# Altium PCB etb_drv.PcbDoc (part 1 of 2)
Units mil, origin at the board's own origin, x right, y up, seen from the top; angles counter-clockwise.
Board outline 2950 x 2250 mil, 2 copper layers (Top Layer, Bottom Layer), stack 44.882 mil thick; 125 components, 73 nets, 385 pads, 207 vias.
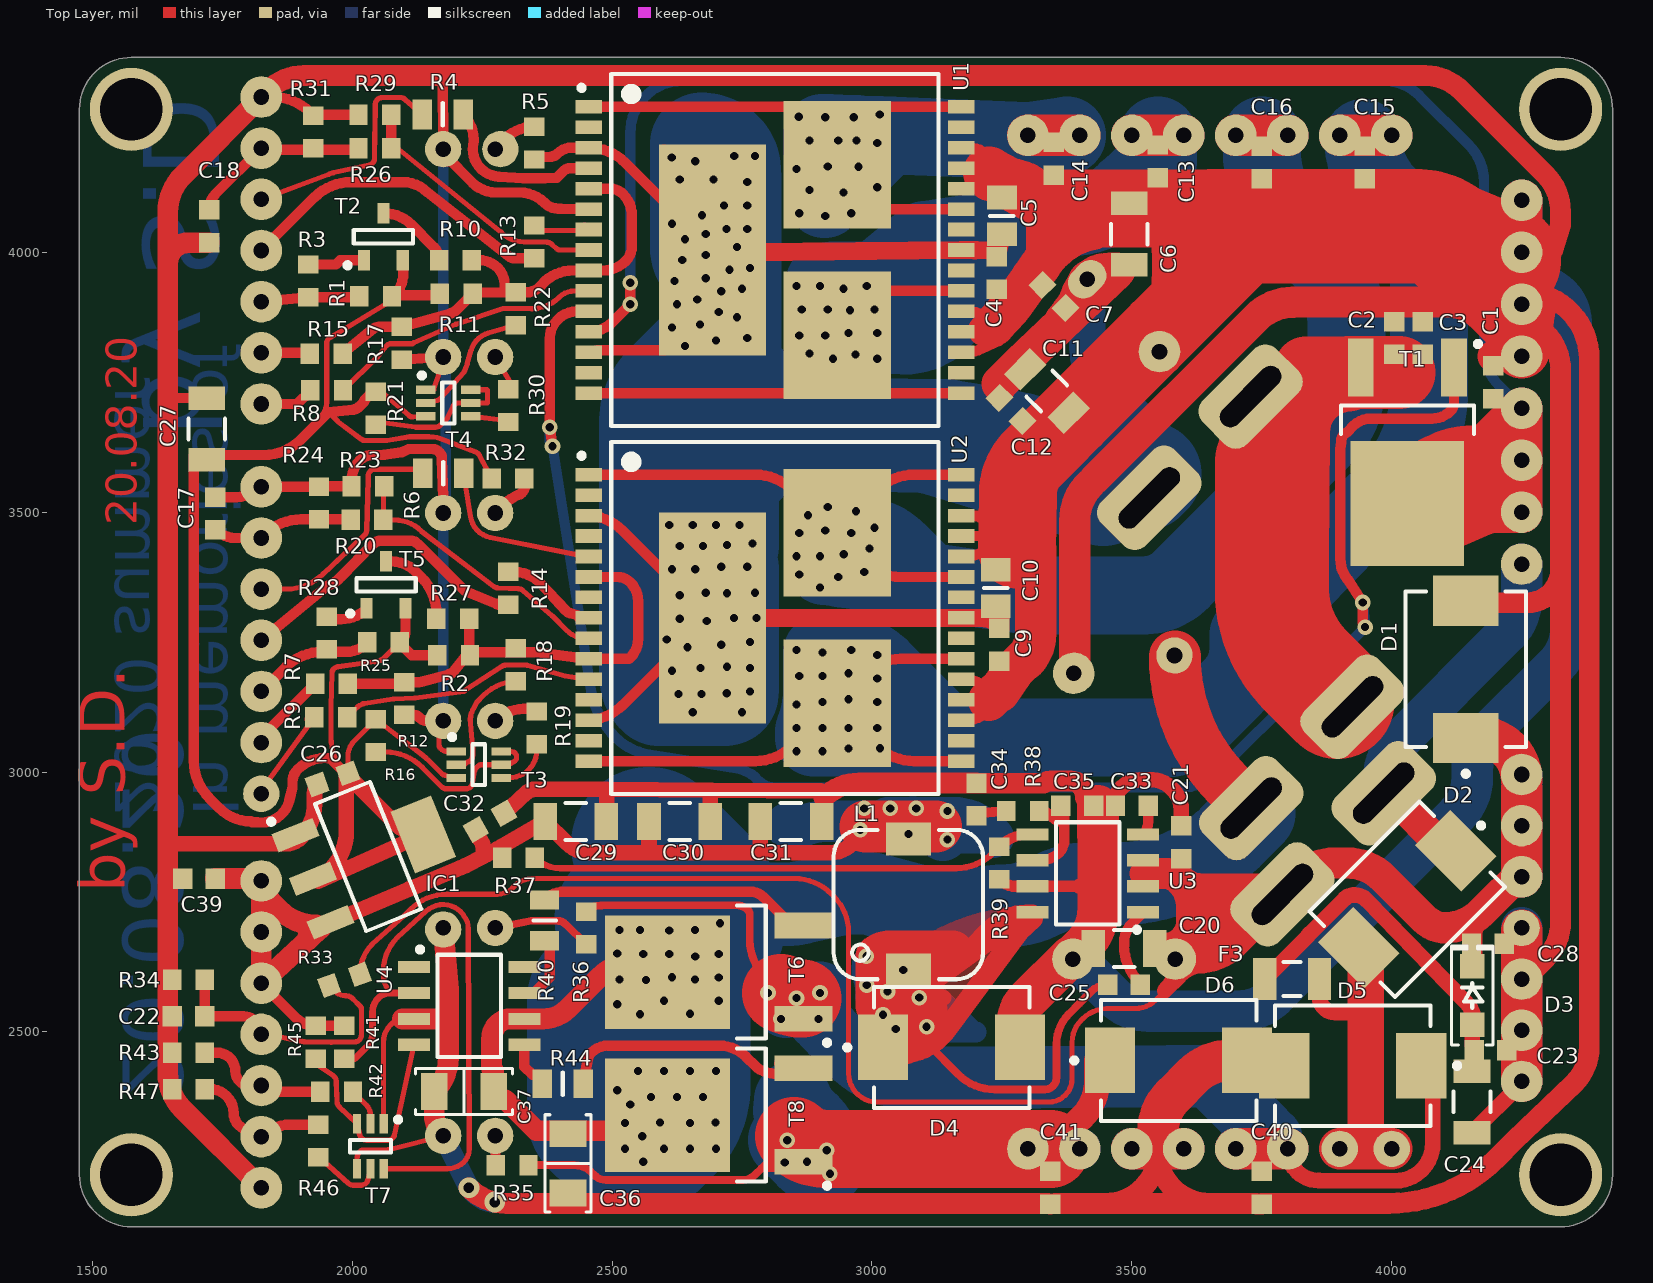
[diagram p0: Top Layer view]
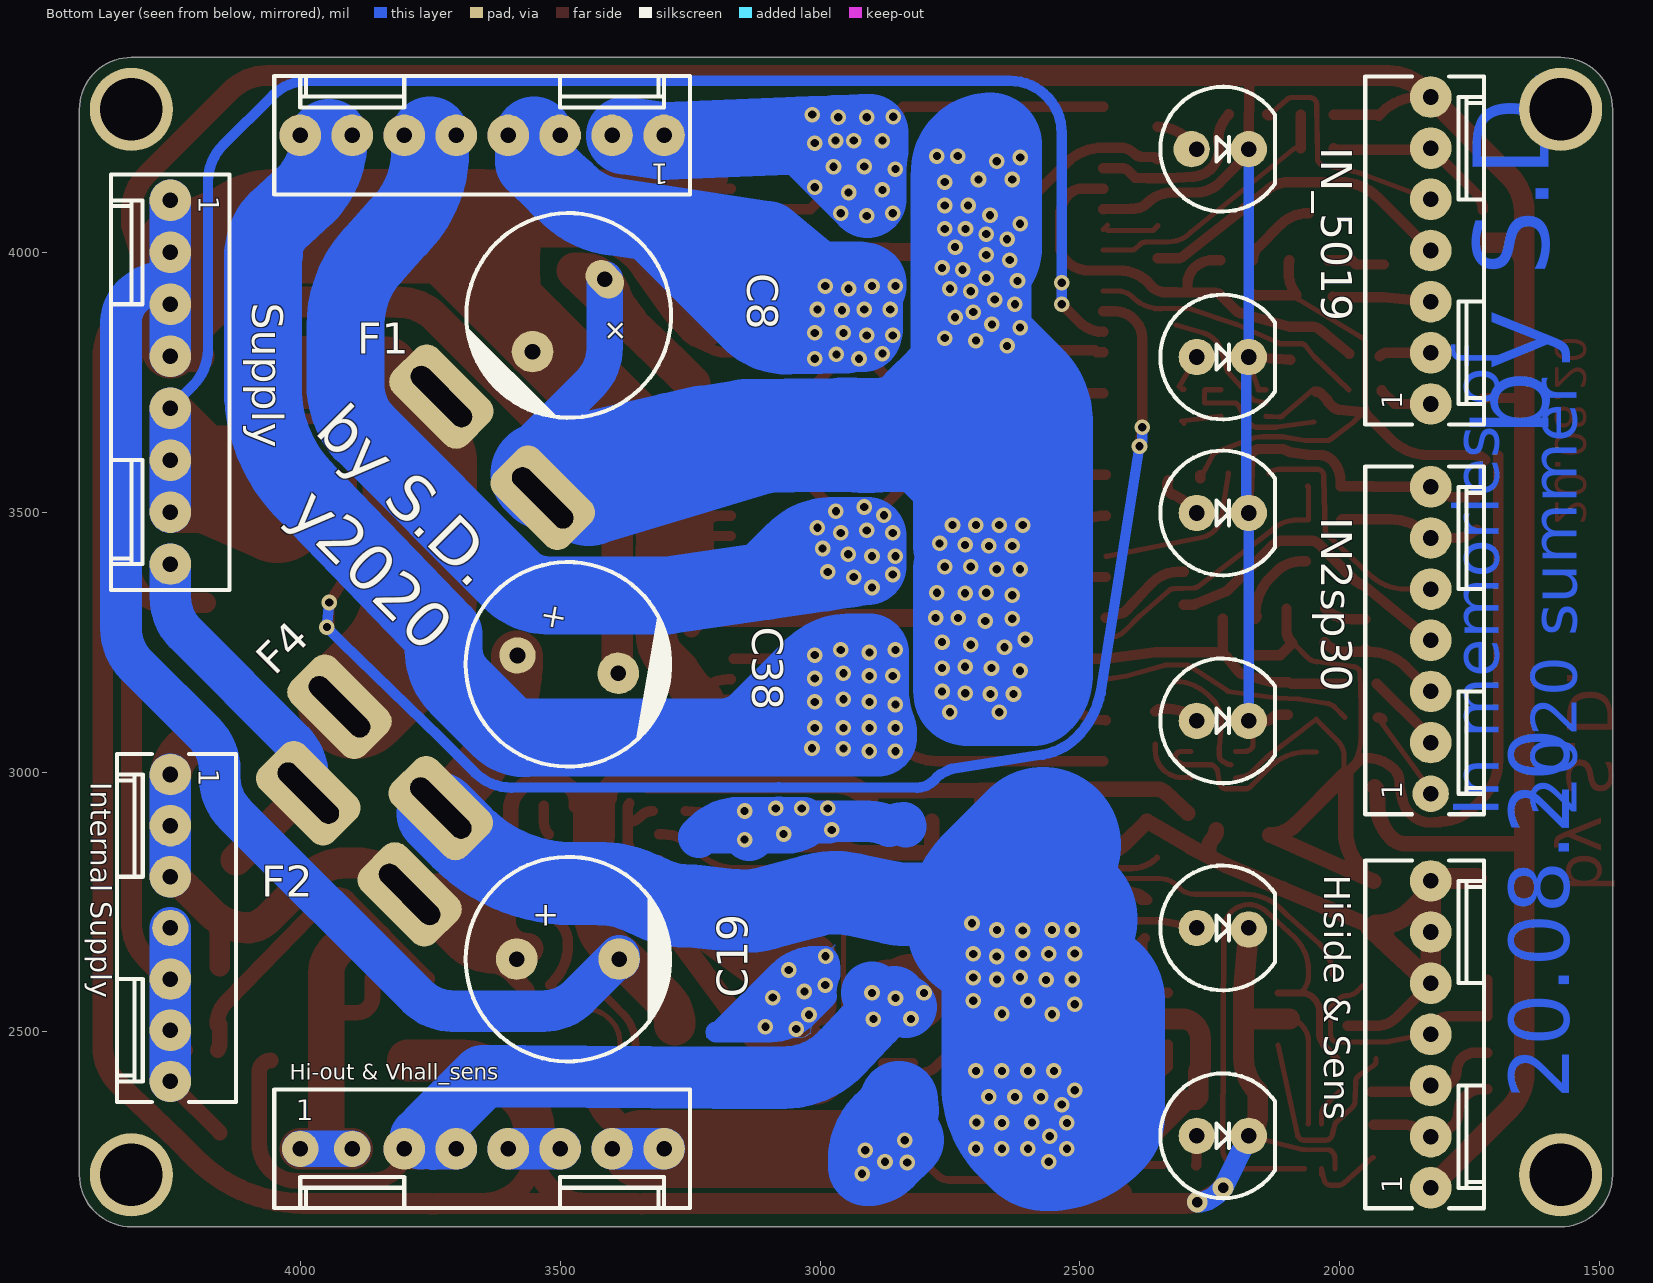
[diagram p1: Bottom Layer view, seen from below]
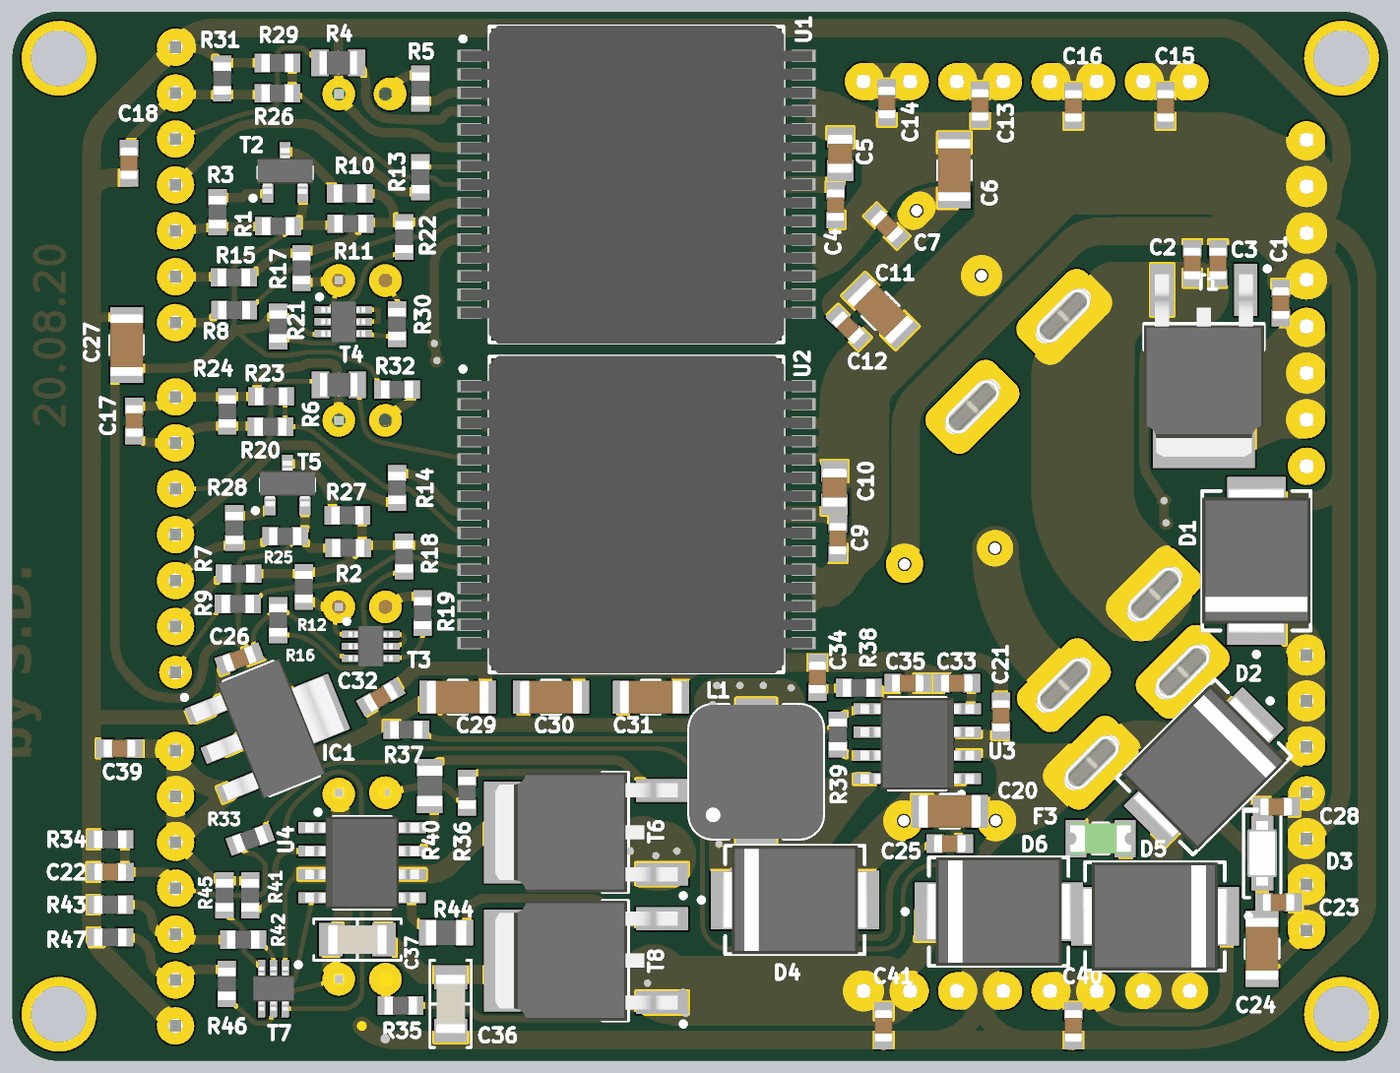
[diagram p3: 3D render of the assembled board from above, using the file's embedded part models]
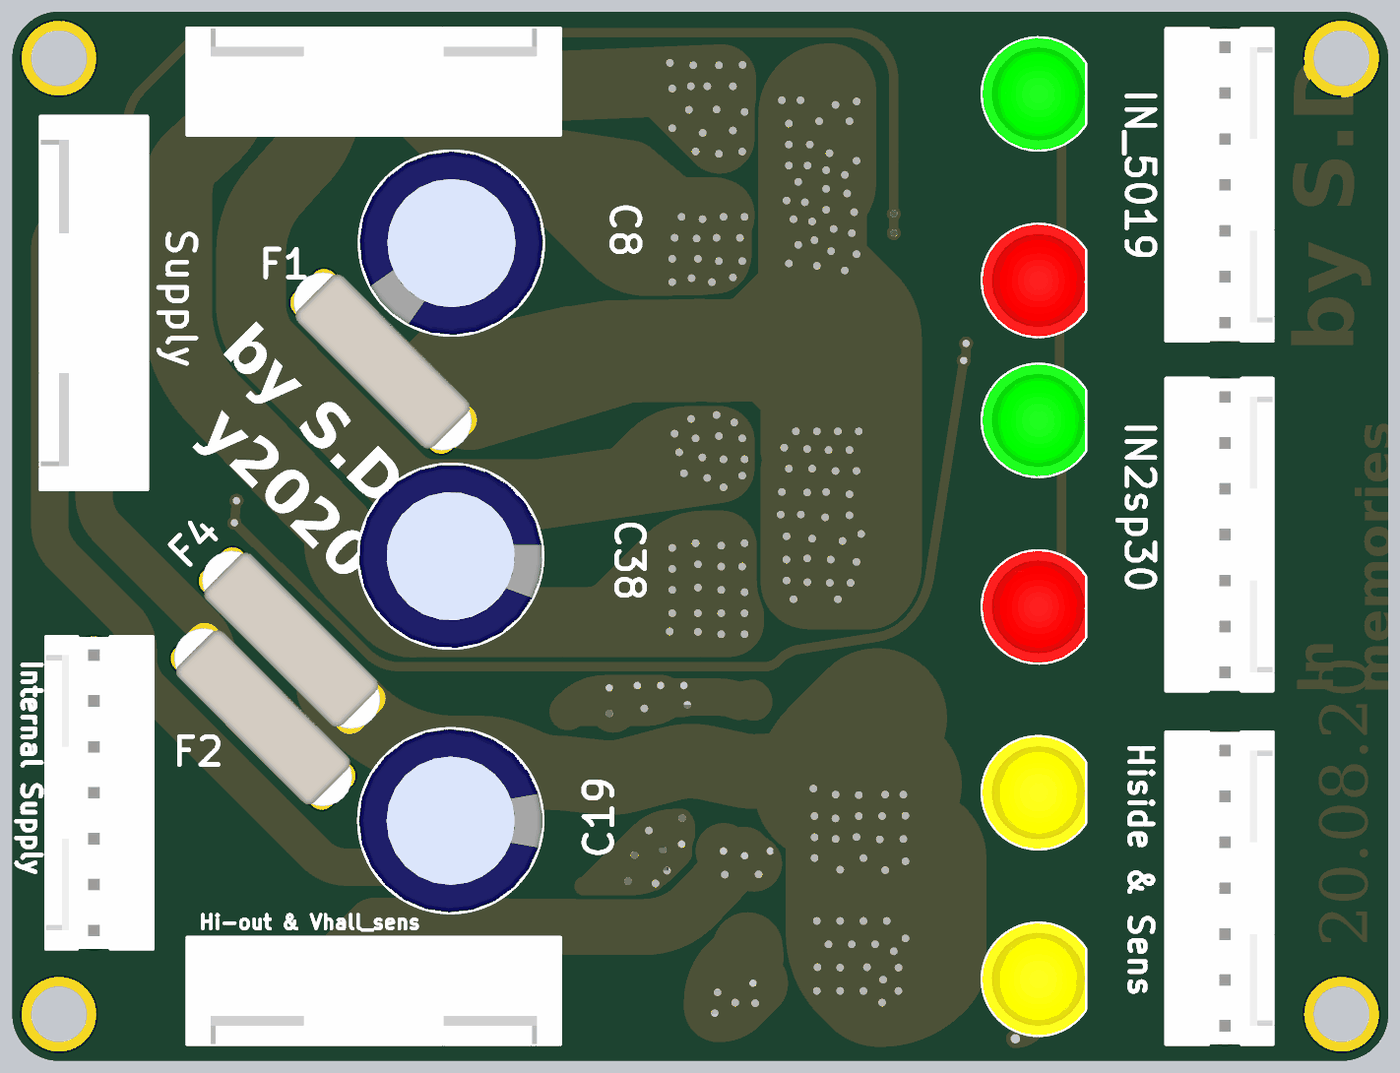
[diagram p4: 3D render of the assembled board from below, using the file's embedded part models]

## Layer stack, top to bottom
Top Solder: solder mask 0.4, Solder Resist, Dk 3.5
Top Layer: signal copper 2.7559
Dielectric 1: dielectric 39.37, FR-4, Dk 4.8
Bottom Layer: signal copper 2.7559
Bottom Solder: solder mask 0.4, Solder Resist, Dk 3.5

## Board outline
1575,2125 cw(c1575,2225) 1475,2225 1475,4275 cw(c1575,4275) 1575,4375 4325,4375 cw(c4325,4275) 4425,4275 4425,2225 cw(c4325,2225) 4325,2125

## Design rules (kind name [scope] priority, off if disabled: settings)
Clearance [All] p1: gap=8 ignorepadtopadclearanceinfootprint=FALSE
PolygonConnect [All] p1: connectstyle=Relief reliefconductorwidth=10 reliefentries=4 polygonreliefangle="90 Angle" airgapwidth=10
RoutingVias [All] p1: holewidth=28 width=50 viastyle="Through Hole" minholewidth=28 minwidth=50 maxholewidth=28 maxwidth=50
SolderMaskExpansion [All] p1: expansion=4 istentingtop=FALSE
Width power [All] p1: maxlimit=1000 minlimit=10 preferedwidth=100 minimp=50.000000 maximp=50.000000 favimp=50.000000 checkconnectedcopper=TRUE
Width [All] p2: maxlimit=1000 minlimit=10 preferedwidth=20 minimp=50.000000 maximp=50.000000 favimp=50.000000
30 further rules are at their usual default settings.

## Classes and differential pairs
net class U_power_Nets: boot comp drive NetC34_2 sense ss
net class U_hiside_Nets: in1 in2 NetR40_2 NetR42_2 NetR44_2 NetR46_2 NetU4_1 NetU4_8 out1 out2 Vhiside
net class Sheet1_Nets: cp cs_2sp30 cs_5019 dis_2sp30 dis_5019 en_2sp30 en_5019 ina_2sp30 ina_5019 inb_2sp30 inb_5019 led_2sp30 led_3v led_5019 led_on NetLD1_2 NetLD5_2 NetR2_1 NetR3_2 NetR4_2 NetR6_2 NetR8_2 NetR9_2 NetR10_1 NetR10_2 NetR13_2 NetR14_2 NetR16_1 NetR18_1 NetR19_1 NetR20_2 NetR21_1 NetR22_1 NetR26_2 NetR27_1 NetR28_2 NetR30_1 outa_2sp30 outa_5019 outb_2sp30 outb_5019 pwm_2sp30 pwm_5019 v_d v_main Vbrige Vhall Vin_sense Vraw
component class U_power: C25 C26 C27 C28 C29 C30 C31 C32 C33 C34 C35 D4 IC1 L1 R37 R38 R39 U3
component class U_hiside: C36 C37 C38 C39 C40 C41 D5 D6 F4 R40 R41 R42 R43 R44 R45 R46 R47 T6 T7 T8 U4
component class Sheet1: C1 C2 C3 C4 C5 C6 C7 C8 C9 C10 C11 C12 C13 C14 C15 C16 C17 C18 C19 C20 C21 C22 C23 C24 D1 D2 D3 F1 F2 F3 J1 J2 J3 J4 J5 J6 J7 LD1 LD2 LD3 LD4 LD5 LD6 R1 R2 R3 R4 R5 R6 R7 R8 R9 R10 R11 R12 R13 R14 R15 R16 R17 R18 R19 R20 R21 R22 R23 R24 R25 R26 R27 R28 R29 R30 R31 R32 R33 R34 R35 R36 T1 T2 T3 T4 T5 U1 U2

## Components (designator, comment, footprint, x,y, rotation, side; value= is the part's Value field where it differs from the comment)
C1 "100n" CAPC1608X87N 4195,3750 r270 top
C2 "100n" CAPC1608X87N 4005,3835 r270 top
C3 "100n" CAPC1608X87N 4060,3835 r270 top
C4 "100n" CAPC1608X87N 3240,3960 r90 top
C5 "1u" CAPC2012X88N 3250,4070 r270 top
C6 "22u" CAPC3216X140N 3495,4035 r270 top
C7 "100n" CAPC1608X87N 3350,3915 r315 top
C8 "330u" "CAP AL TH D10 L5 H12.5"#1 3483.54,3878.54 r315 bottom
C9 "100n" CAPC1608X87N 3245,3245 r90 top
C10 "1u" CAPC2012X88N 3238.03,3354.18 r270 top
C11 "22u" CAPC3216X140N 3336.43,3733.12 r135 top
C12 "100n" CAPC1608X87N 3267.27,3697.73 r135 top
C13 "10n" CAPC1608X87N 3550,4175 r90 top
C14 "10n" CAPC1608X87N 3350,4180 r90 top
C15 "10n" CAPC1608X87N 3947.78,4173 r90 top
C16 "10n" CAPC1608X87N 3750,4172.91 r90 top
C17 "10n" CAPC1608X87N 1736.1,3497.36 r270 top
C18 "10n" CAPC1608X87N 1725,4050 r90 top
C19 "330u" "CAP AL TH D10 L5 H12.5"#2 3485,2640 r180 bottom
C20 "22u" CAPC3216X140N 3485,2660.36 r0 top
C21 "100n" CAPC1608X87N 3595,2865 r270 top
C22 "10n" CAPC1608X87N 1685,2530 r0 top
C23 "100n" CAPC1608X87N 4190,2465 r180 top
C24 "22u" CAPC3216X140N 4154.69,2365.35 r90 top
C25 "100n" CAPC1608X87N 3485,2590.79 r180 top
C26 "100n" CAPC1608X87N 1961.94,2986.98 r20 top
C27 "22u" CAPC3216X140N 1720,3660 r270 top
C28 "100n" CAPC1608X87N 4185,2670 r180 top
C29 "22u" CAPC3216X140N 2430,2905 r180 top
C30 "22u" CAPC3216X140N 2630,2905 r180 top
C31 "22u" CAPC3216X140N 2844.06,2905 r180 top
C32 "100n" CAPC1608X87N 2265,2905 r210 top
C33 "27n" CAPC1608X87N 3500,2935 r0 top
C34 "2n" CAPC1608X87N 3201.06,2947.08 r270 top
C35 "10p" CAPC1608X87N 3395,2935 r180 top
C36 "100n" "CAP 1206/3216 - 0.8MM" 2415,2247.09 r90 top
C37 "100n" "CAP 1206/3216 - 0.8MM" 2215,2385 r0 top
C38 "330u" "CAP AL TH D10 L5 H12.5"#3 3485.08,3207.16 r190 bottom
C39 "100n" CAPC1608X87N 1705,2795 r0 top
C40 "10n" CAPC1608X87N 3750,2200 r90 top
C41 "10n" CAPC1608X87N 3343.29,2200.2 r90 top
D1 "MBRS320T3G" DIOM7659X265N 4142.54,3197.54 r90 top
D2 "MBRS320T3G" DIOM7659X265N 4030,2755 r225 top
D3 "" SOD123F 4155,2570 r90 top
D4 "Device" DIOM7659X265N 3153.11,2470 r0 top
D5 "Device" DIOM7659X265N 3925,2435 r180 top
D6 "Device" DIOM7659X265N 3590,2445 r0 top
F1 "ETB 1 [10A]" "automotive fuse by sd" 3631,3625 r45 bottom
F2 "Main [5A]" "automotive fuse by sd" 3887.12,2861.88 r45 bottom
F3 "1A 30V" FUSC_LITTELFUSE_466 3808.49,2601.76 r0 top
F4 "HI-side [20A]" "automotive fuse by sd" 3827.12,3028.14 r225 bottom
IC1 "1117-3.3" SOT230P700X180-4N 2030.49,2837.47 r22 top
J1 "ETB motors" MOLEX_22-27-2081#1 3650,4225 r0 bottom
J2 "Supply" MOLEX_22-27-2081#1 4250,3750 r270 bottom
J3 "Hi-out & Vhall_sens" MOLEX_22-27-2081#2 3650,2275 r180 bottom
J4 "Hiside & Sens" MOLEX_22-04-1071#1 1825,2495.27 r90 bottom
J5 "IN_5019" MOLEX_22-04-1071#1 1825,4003.46 r90 bottom
J6 "IN2sp30" MOLEX_22-04-1071#2 1825,3253.46 r90 bottom
J7 "Internal Supply" MOLEX_22-04-1071#3 4250,2700 r270 bottom
L1 "33uH" IND_WURTH_WE-PD_7332(METAL) 3070,2745 r90 top
LD1 "" LED_5MM_YELLOW_1C-2A#1 2225,2300 r0 bottom
LD2 "" LED_5MM_GREEN_1C-2A#1 2225,4198.46 r0 bottom
LD3 "" LED_5MM_RED_1C-2A 2225,3798.46 r0 bottom
LD4 "" LED_5MM_RED_1C-2A 2225,3098.46 r0 bottom
LD5 "" LED_5MM_YELLOW_1C-2A#2 2225,2700 r0 bottom
LD6 "" LED_5MM_GREEN_1C-2A#2 2225,3498.46 r0 bottom
R1 "10k" RESC1608X55N 2045,3915 r0 top
R2 "1k [DNP]" RESC1608X55N 2195,3225 r180 top
R3 "1k" RESC1608X55N 1915,3945 r90 top
R4 "1k" RESC2013X64N 2174.06,4265.26 r0 top
R5 "2k2" RESC1608X55N 2350,4209.96 r90 top
R6 "1k" RESC2013X64N 2175,3575 r0 top
R7 "1k" RESC1608X55N 1960,3170 r0 top
R8 "1k" RESC1608X55N 1950.78,3734.88 r0 top
R9 "1k" RESC1608X55N 1958.5,3105 r0 top
R10 "1k" RESC1608X55N 2198.5,3985 r180 top
R11 "1k [DNP]" RESC1608X55N 2200,3920 r180 top
R12 "10k" RESC1608X55N 2100,3141.5 r90 top
R13 "1k" RESC1608X55N 2350,4020 r90 top
R14 "1k" RESC1608X55N 2300,3353.5 r90 top
R15 "1k" RESC1608X55N 1950,3805 r0 top
R16 "1k" RESC1608X55N 2045,3070 r90 top
R17 "10k" RESC1608X55N 2095,3825 r90 top
R18 "1k" RESC1608X55N 2315,3206.5 r90 top
R19 "1k" RESC1608X55N 2355,3085 r90 top
R20 "10k" RESC1608X55N 2028.5,3485 r0 top
R21 "1k" RESC1608X55N 2045,3700 r90 top
R22 "1k" RESC1608X55N 2315,3891.5 r90 top
R23 "2k2" RESC1608X55N 2030,3550 r0 top
R24 "2k2" RESC1608X55N 1935.98,3517.62 r270 top
R25 "10k" RESC1608X55N 2060,3250 r0 top
R26 "10k" RESC1608X55N 2043.5,4200 r0 top
R27 "1k" RESC1608X55N 2193.5,3295 r0 top
R28 "1k" RESC1608X55N 1950.98,3267.58 r90 top
R29 "2k2" RESC1608X55N 2043.5,4265 r0 top
R30 "510" RESC1608X55N 2300,3705 r90 top
R31 "2k2" RESC1608X55N 1925,4231.5 r270 top
R32 "2k2" RESC1608X55N 2299.84,3564.79 r0 top
R33 "10k" RESC1608X55N 1985,2600 r20 top
R34 "2k2" RESC1608X55N 1685,2600 r0 top
R35 "2k2" RESC1608X55N 2307.61,2243.64 r0 top
R36 "2k2" RESC1608X55N 2450,2700 r90 top
R37 "" RESC1608X55N 2320,2835 r180 top
R38 "15.4k" RESC1608X55N 3290,2925 r0 top
R39 "" RESC1608X55N 3245,2825 r90 top
R40 "10" RESC2012X60N 2370,2714.37 r90 top
R41 "1k" RESC1608X55N 1985,2480 r90 top
R42 "1k" RESC1608X55N 1970,2385 r0 top
R43 "10k" RESC1608X55N 1685,2460 r0 top
R44 "10" RESC2012X60N 2405,2400 r0 top
R45 "1k" RESC1608X55N 1930,2480 r90 top
R46 "1k" RESC1608X55N 1935,2290 r270 top
R47 "10k" RESC1608X55N 1685,2390 r0 top
T1 "" TO228P991X239-3N-R546X521 4030,3615 r270 top
T2 "BC857B" SOT95P230X110-3N 2060,4030 r90 top
T3 "BC847BV" SOT65P210X110-6N 2243.34,3014.14 r0 top
T4 "BC847BV" SOT65P210X110-6N 2185,3710 r0 top
T5 "BC857B" SOT95P230X110-3N 2065,3360 r90 top
T6 "Device" TO228P991X239-3N-R546X521 2705,2615 r180 top
T7 "BC847BV" SOT65P210X110-6N 2035,2280 r270 top
T8 "Device" TO228P991X239-3N-R546X521 2705,2340 r180 top
U1 "VNH5019A-E" STMicroelectronics_MultiPowerSO-30_0 2813.27,4004.41 r270 top
U2 "VNH2SP30-E" STMicroelectronics_MultiPowerSO-30_0 2813.27,3296.57 r270 top
U3 "TPS54331D" SOIC127P600X175-8N 3415.31,2805 r180 top
U4 "IR4427STRPBF" SOIC127P600X175-8N 2225,2550 r0 top

## Footprints (in the part's own frame and the unit in brackets; to place one, negate y for a bottom-side part, rotate by r counter-clockwise, add the part's x,y. Pads: shape width x height; smd on the part's side, far side on the other; paste and mask are expansions set on the pad)
"automotive fuse by sd" [mil]
  rrect50% 200x120 hole 40 slot 150 at 0 deg: 1(-137.8,0) 2(137.8,0)
  body extent -244,-69 244,69, height 512
"CAP 1206/3216 - 0.8MM" [mm] "Chip Capacitor, 2-Leads, Body 3.25x1.60mm, IPC Medium Density"
  rect 1.3x1.8 smd: 1(-1.45,0) 2(1.45,0)
  silkscreen extent -2.37,-1.12 2.37,1.12, body extent -1.6,-0.8 1.6,0.8, height 0.8
"CAP AL TH D10 L5 H12.5"#1 [mil] "10MM Diameter, 5MM Lead Spacing Aluminium Capacitor"
  oval 60x80 hole 30: 1(-98.43,0)
  round 80 hole 30: 2(98.43,0)
  silkscreen extent -197,-197 197,197, body extent -197,-197 197,197, height 500
"CAP AL TH D10 L5 H12.5"#2 [mil] "10MM Diameter, 5MM Lead Spacing Aluminium Capacitor"
  round 80 hole 30: 1(-98.43,0) 2(98.43,0)
  silkscreen extent -197,-197 197,197, body extent -197,-197 197,197, height 500
"CAP AL TH D10 L5 H12.5"#3 [mil] "10MM Diameter, 5MM Lead Spacing Aluminium Capacitor"
  round 70 hole 30: 1(-98.43,0)
  round 80 hole 30: 2(98.43,0)
  silkscreen extent -197,-197 197,197, body extent -197,-197 197,197, height 500
CAPC1608X87N [mm] "Chip Capacitor, Body 1.6x0.8mm IPC Medium Density"
  rect 0.95x1 smd: 1(-0.8,0) 2(0.8,0)
  body extent -0.87,-0.47 0.88,0.48, height 0.87
CAPC2012X88N [mm] "Chip Capacitor, Body 2.0x1.25mm, IPC Medium Density"
  rect 1.15x1.45 smd: 1(-0.9,0) 2(0.9,0)
  silkscreen extent 0,-0.58 0,0.58, body extent -1.05,-0.67 1.05,0.68, height 0.9
CAPC3216X140N [mm] "Chip Capacitor, Body 3.2x1.6mm, IPC Medium Density"
  rect 1.15x1.8 smd: 1(-1.5,0) 2(1.5,0)
  silkscreen extent -0.5,-0.9 0.5,0.9, body extent -1.7,-0.9 1.7,0.9, height 1.4
DIOM7659X265N [mm] "DO-214-AB/SMC Molded Diode, Body 7.95x5.9mm, IPC Medium Density"
  rect 2.45x3.2 smd: 1(-3.35,0) 2(3.35,0)
  silkscreen extent -5.22,-2.95 3.8,2.95, body extent -3.97,-2.95 3.98,2.95, height 2.65
FUSC_LITTELFUSE_466 [mm] "Very Fast-Acting Surface Mount Thin Film Fuse, Size 1206, Serie 466"
  rect 1.14x2.03 smd: 1(-1.335,0) 2(1.335,0)
  silkscreen extent -0.41,-0.83 0.42,0.83, body extent -1.65,-0.83 1.65,0.83, height 0.66
IND_WURTH_WE-PD_7332(METAL) [mm] "Power Choke, WE-PD Serie, Body 7.3x7.3mm (Metal Base)"
  rect 1.6x2.2 smd: 1(-3.2,0) 2(3.2,0)
  silkscreen extent -3.65,-3.65 3.65,3.65, body extent -3.65,-3.65 3.65,3.65, height 3.4
LED_5MM_GREEN_1C-2A#1 [mil] "LED, Green, Body Dia. 5.08mm, Pin spacing 2.54mm"
  round 70 hole 30: 1(-50,0)
  round 70 hole 30 copper offset 10,0: 2(50,0)
  silkscreen extent -101,-120 120,120, body extent -100,-120 120,120, height 565
LED_5MM_GREEN_1C-2A#2 [mil] "LED, Green, Body Dia. 5.08mm, Pin spacing 2.54mm"
  round 70 hole 30: 1(-50,0) 2(50,0)
  silkscreen extent -101,-120 120,120, body extent -100,-120 120,120, height 565
LED_5MM_RED_1C-2A [mil] "LED, Red, Body Dia. 5.08mm, Pin spacing 2.54mm"
  round 70 hole 30: 1(-50,0) 2(50,0)
  silkscreen extent -101,-120 120,120, body extent -100,-120 120,120, height 565
LED_5MM_YELLOW_1C-2A#1 [mil] "LED, Yellow, Body Dia. 5.08mm, Pin spacing 2.54mm"
  round 70 hole 30: 1(-50,0) 2(50,0)
  silkscreen extent -101,-120 120,120, body extent -100,-120 120,120, height 565
LED_5MM_YELLOW_1C-2A#2 [mil] "LED, Yellow, Body Dia. 5.08mm, Pin spacing 2.54mm"
  round 70 hole 30 copper offset 0,3: 1(-50,0)
  round 70 hole 30: 2(50,0)
  silkscreen extent -101,-120 120,120, body extent -100,-120 120,120, height 565
MOLEX_22-04-1071#1 [mil] "2.5mm (.100\") Pitch KK® Header, Single Row, Vertical, 7 Circuits"
  round 80 hole 30: 1(-295.27,0) 2(-196.85,0) 3(-98.42,0) 4(0,0) 5(98.43,0) 6(196.85,0) 7(295.28,0)
  silkscreen extent -335,-102 335,126, body extent -335,-102 335,126, height 461
MOLEX_22-04-1071#2 [mil] "2.5mm (.100\") Pitch KK® Header, Single Row, Vertical, 7 Circuits"
  round 70 hole 30: 1(-295.27,0)
  round 80 hole 30: 2(-196.85,0) 3(-98.42,0) 4(0,0) 5(98.43,0) 6(196.85,0) 7(295.28,0)
  silkscreen extent -335,-102 335,126, body extent -335,-102 335,126, height 461
MOLEX_22-04-1071#3 [mil] "2.5mm (.100\") Pitch KK® Header, Single Row, Vertical, 7 Circuits"
  round 80 hole 30: 1(-295.27,0) 2(-196.85,0) 3(-98.42,0) 5(98.43,0) 6(196.85,0) 7(295.28,0)
  round 70 hole 30: 4(0,0)
  silkscreen extent -335,-102 335,126, body extent -335,-102 335,126, height 461
MOLEX_22-27-2081#1 [mil] "2.54mm (.100\") Pitch KK® Header, Single Row, Vertical, 8 Circuits"
  round 80 hole 30: 1(-350,0) 2(-250,0) 3(-150,0) 4(-50,0) 5(50,0) 6(150,0) 7(250,0) 8(350,0)
  silkscreen extent -400,-114 400,114, body extent -400,-114 400,114, height 461
MOLEX_22-27-2081#2 [mil] "2.54mm (.100\") Pitch KK® Header, Single Row, Vertical, 8 Circuits"
  round 70 hole 30: 1(-350,0) 2(-250,0)
  round 80 hole 30: 3(-150,0) 4(-50,0) 5(50,0) 6(150,0) 7(250,0) 8(350,0)
  silkscreen extent -400,-114 400,114, body extent -400,-114 400,114, height 461
RESC1608X55N [mm] "Chip Resistor, EIA 0603, Metric 1608, Body 1.6x0.8mm, IPC Medium Density"
  rect 0.9x1 smd: 1(-0.8,0) 2(0.8,0)
  body extent -0.87,-0.47 0.88,0.48, height 0.55
RESC2012X60N [mm] "Chip Resistor, EIA 0805, Metric 2012, Body 2.0x1.2mm, IPC Medium Density"
  rect 0.95x1.4 smd: 1(-1,0) 2(1,0)
  silkscreen extent 0,-0.55 0,0.55, body extent -1.1,-0.67 1.1,0.68, height 0.6
RESC2013X64N [mm] "Chip Resistor, EIA 0805, Metric 2013, Body 2.03x1.27mm, IPC Medium Density"
  rect 0.95x1.45 smd: 1(-1,0) 2(1,0)
  silkscreen extent 0,-0.55 0,0.55, body extent -1.02,-0.63 1.02,0.64, height 0.64
SOD123F [mm] "SODFL, 2-Leads, Body 1.60x3.50mm, IPC Medium Density"
  rect 1.2x1.2 smd: 1(-1.43,0) 2(1.43,0)
  silkscreen extent -2.41,-1.02 2.41,1.02, body extent -1.75,-0.8 1.75,0.8, height 1.1
SOIC127P600X175-8N [mm] "SOIC 8, Pitch 1.27mm - Body 4x5mm, IPC Medium Density"
  rect 1.55x0.6 smd: 1(-2.7,1.905) 2(-2.7,0.635) 3(-2.7,-0.635) 4(-2.7,-1.905) 5(2.7,-1.905) 6(2.7,-0.635) 7(2.7,0.635) 8(2.7,1.905)
  silkscreen extent -2.53,-2.5 1.55,2.88, body extent -3.1,-2.5 3.1,2.5, height 1.75
SOT65P210X110-6N [mm] "SOT363, SC70-6, SOT, 0.65mm Pitch, 6 pin, 1.25mm W X 2.00mm L X 1.10mm H, IPC Medium Density"
  rect 0.95x0.4 smd: 1(-1.1,0.65) 2(-1.1,0) 3(-1.1,-0.65) 4(1.1,-0.65) 5(1.1,0) 6(1.1,0.65)
  silkscreen extent -1.42,-1 0.3,1.47, body extent -1.2,-1.1 1.2,1.1, height 1.1
SOT95P230X110-3N [mm] "SOT23, 3 pin, Pitch 0.95mm - 1.3mm W X 2.9mm L X 1.1mm H, IPC Medium Density"
  rect 1x0.6 smd: 1(-1.15,0.95) 2(-1.15,-0.95) 3(1.15,0)
  silkscreen extent -1.52,-1.45 0.33,1.87, body extent -1.17,-1.5 1.33,1.5, height 1.1
SOT230P700X180-4N [mm] "SOT223, 2.30mm pitch; 3 pin, 3.70mm W X 6.70mm L, IPC Medium Density"
  rect 2.15x0.95 smd: 1(-2.9,2.3) 2(-2.9,0) 3(-2.9,-2.3)
  rect 2.15x3.25 smd: 4(2.9,0)
  silkscreen extent -3.87,-3.35 1.45,3.47, body extent -3.65,-3.35 3.65,3.35, height 1.81
STMicroelectronics_MultiPowerSO-30_0 [mm]
  rect 0.665x1.3 smd paste+0 mask+0: 1(-7,-9.1) 2(-6,-9.1) 3(-5,-9.1) 4(-4,-9.1) 5(-3,-9.1) 6(-2,-9.1) 7(-1,-9.1) 8(0,-9.1) 9(1,-9.1) 10(2,-9.1) 11(3,-9.1) 12(4,-9.1) 13(5,-9.1) 14(6,-9.1) 15(7,-9.1) 16(7,9.1) 17(6,9.1) 18(5,9.1) 19(4,9.1) 20(3,9.1) 21(2,9.1) 22(1,9.1) 23(0,9.1) 24(-1,9.1) 25(-2,9.1) 26(-3,9.1) 27(-4,9.1) 28(-5,9.1) 29(-6,9.1) 30(-7,9.1)
  rect 6.23x5.25 smd paste+0 mask+0: 31(-4.165,3.05) 32(4.165,3.05)
  rect 10.3x5.25 smd paste+0 mask+0: 33(0,-3.05)
  silkscreen extent -8.6,-9.57 8.6,8, body extent -8.75,-9.85 8.75,9.85, height 0.25
TO228P991X239-3N-R546X521 [mm] "TO-252AA DPAK TO, 2.28mm pitch; 2 pin,9.905mm L X 6.095mm W X 2.39mm H body, IPC Medium Density"
  rect 2.85x1.25 smd: 1(-4.15,2.28) 2(-4.15,-2.28)
  rect 6.1x5.55 smd: 3(2.5,0)
  silkscreen extent -5.42,-3.25 -0.9,3.57, body extent -4.99,-3.27 4.95,3.27, height 2.28

## Part data
C1 C2 C3 C4 C5 C6 C7 C9 C10 C11 C12 C13 C14 C15 C16 C17 C18 C20 C21 C22 C23 C24 C25 C26 C27 C28 C29 C30 C31 C32 C33 C34 C35 C36 C37 C39 C40 C41: library part "Capacitor - non polarized", "Non-polarised capacitor"
C8 C19 C38: library part "Capacitor - polarized", "Polarised capacitor"
D1 D2 D3 D4: library part "Diode Schottky", "Schottky Diode"
  D1 D2: Device=MBRS320T3G
D5 D6: library part "Diode ESD", "ESD protection diode"
F1 F2 F4: library part "Fuse 2", "Fuse", LatestRevisionDate=17-Jul-2002, LatestRevisionNote="Re-released for DXP Platform.", PackageDescription="Thru-Hole; 2 Leads", PackageReference=PIN-W2/E2.8, Published=8-Jun-2000, Publisher="Altium Limited"
F3: library part Fuse, "Fuse"
IC1: library part "ON Semi NCP1117", "1.0A Low-Dropout Positive Fixed and Adjustable Voltage Regulators"
J1 J2 J3: library part "Connector 8 Male", "Connector 8 Male"
J4 J5 J6 J7: library part "Connector 7 Male", "Connector 7 Male"
L1: library part Inductor, "Inductor", Device=HPI0630-330
LD1 LD5: library part "LED Blue 1C 2A", "LED Blue 1C 2A"
LD2 LD6: library part "LED Green 1C 2A", "LED Green 1C 2A"
LD3 LD4: library part "LED Red 1C 2A", "LED Red 1C 2A"
R1 R2 R3 R4 R5 R6 R7 R8 R9 R10 R11 R12 R13 R14 R15 R16 R17 R18 R19 R20 R21 R22 R23 R24 R25 R26 R27 R28 R29 R30 R31 R32 R33 R34 R35 R36 R37 R38 R39 R40 R41 R42 R43 R44 R45 R46 R47: library part Resistor, "Resistor"
T1: library part "N-MOSFET-D 1G 2D 3S", "N-CHANNEL MOSFET WITH DIODE"
T2 T5: "PNP Transistor", Case=SOT23-3, Manufacturer="NXP SEMICONDUCTORS", Author="CERN DEM JLC", Component Type=Standard, ComponentHeight=1.1mm, CreateDate=14.06.2011, Device=BC857B, HelpURL=\\cern.ch\dfs\Applications\Altium\Datasheets\BC857B.pdf, LatestRevisionDate=14.06.2011, Manufacturer Part Number=BC857B, Mounted=Yes, PackageDescription="SOT23, 3 pin, Pitch 0.95mm - 1.3mm W X 2.9mm L X 1.1mm H, IPC Medium Density", Part Description="45V 100mA PNP general-purpose transistors", Part Number=BC857B, Pin Count=3, SMD=Yes, Socket=No, Table=Transistors
T3 T4: "45V, 100mA NPN General Purpose Double Transistor", Case=SOT666, Manufacturer="NXP SEMICONDUCTORS", Author="CERN DEM JLC", Component Type=Standard, ComponentHeight=0.6mm, CreateDate=01.12.2011, Device=BC847BV, HelpURL=\\cern.ch\dfs\Applications\Altium\Datasheets\BC847BV.pdf, LatestRevisionDate=01.12.2011, Manufacturer Part Number=BC847BV, Mounted=Yes, PackageDescription="SOTFL (SOT666), 0.50mm, Pitch; 6 Pin, 1.20mm W X 1.60mm L X 0.60mm H Body, IPC Medium Density", Part Description="45V 100mA NPN General Purpose Double Transistor", Part Number=BC847BV, Pin Count=6, SMD=Yes, Socket=No, Table=Transistors
T6 T8: library part "P-MOSFET-D 1D 2G 3S", "P-CHANNEL MOSFET WITH DIODE"
T7: "45V, 100mA NPN General Purpose Double Transistor", Device=BC847BV
U1: "Motor Driver Power MOSFET Parallel, PWM MultiPowerSO-30", Package="PowerSOP-30 STMicroelectronics", Availability=Unavailable, MF=STMicroelectronics, MP=VNH5019A-E, Price=None, SnapEDA_Link=https://www.snapeda.com/parts/VNH5019A-E/STMicroelectronics/view-part/231156/?ref=snap
U2: "IC MOTOR DRIVER PAR 30MULTIPWRSO", Digikey Part Number=497-4500-5-ND, Manufacturer=STMicroelectronics, Mfg Package Ident=MultiPowerSO-30, Mouser Part Number=511-VNH2SP30-E, Temperature="-40°C to +150°C", Temperature Range High=+150°C, Temperature Range Low=-40°C, Voltage=16V, ComponentLink1Description=Upverter, ComponentLink1URL=https://upverter.com/upn/revision/311e1642ff6559a6/, ComponentLink2Description=Datasheet, ComponentLink2URL=http://www.st.com/content/ccc/resource/technical/document/datasheet/group2/66/b8/f5/2c/9a/66/41/c7/CD00043711/files/CD00043711.pdf/jcr:content/translations/en.CD00043711.pdf, Digikey Description="IC MOTOR DRIVER PAR 30MULTIPWRSO", HelpURL=https://upverter.com/upn/revision/311e1642ff6559a6/, Lead Free=yes, Package=MultiPowerSO-30, RoHS=TRUE, Supplier 1=Digi-Key, Supplier 2=Mouser, Supplier Part Number 1=497-4500-5-ND, Supplier Part Number 2=511-VNH2SP30-E
U3: "Buck Step Down Regulator with 3.5 to 28 V Input and 0.8 to 25 V Output, -40 to 150 degC, 8-Pin SOIC (D), Green (RoHS & no Sb/Br)", Manufacturer="Texas Instruments", Rating=Catalog, Switch Current Limit(Typ)(A)=3.5, Code_JEDEC=MS-012AA, ComponentLink1Description=Datasheet, ComponentLink1URL=http://www.ti.com/general/docs/lit/getliterature.tsp?genericPartNumber=TPS54331&fileType=pdf, ComponentLink2Description="Package Specification", ComponentLink2URL=http://www.ti.com/litv/pdf/msoi002j, ComponentLink3Description="URL Link1", ComponentLink3URL="Samples URL:http://www.ti.com/product/tps54331#samples", DatasheetVersion=SLVS839D, Duty Cycle(Max)(%)=90, Eco-Plan="Green (RoHS & no Sb/Br)", Iout(Max)(A)=3, Iq(Typ)(mA)=0.11, Mounting Technology="Surface Mount", PackageDescription="8-Pin Plastic Small Outline Integrated Circuit, 4.9 x 3.9 mm, Pitch 1.27 mm Pitch", PackageReference=D8, PackageVersion="revM, Jun-2011", PartNumber=TPS54331D, Regulated Outputs(#)=1, SubFamily="Step-Down Regulator", Topology=Buck, Vin(Max)(V)=28, Vin(Min)(V)=3.5, Vout(Max)(V)=25, Vout(Min)(V)=0.8

## Free pads (board coordinates)
  round 160 hole 120: ""(1575,2225) ""(1575,4275) ""(4325,2225) ""(4325,4275)

## Via types
v1: diameter 30, hole 15.75, Top Layer to Bottom Layer, 199 vias
v2: diameter 30, hole 15.75, Top Layer to Bottom Layer, tented both sides, 6 vias
v3: diameter 40, hole 20, Top Layer to Bottom Layer, 2 vias

## Nets (pads, with @x,y where several pads share a name; then routed paths per layer and width w, separated by ;. In a path a pad name is that pad's centre, name@x,y a point inside that pad or via, vN(x,y) a via of type N, cw(c..) or ccw(c..) an arc to the next point about the centre after c; other vN are vias at no path point)
+5v: C29.2 C30.2 C31.2 C32.2 C39.2 IC1.3 J4.5 J4.6 J4.7 L1.2 R37.2 R41.2 R45.2 | length 2981.1
  Top Layer w20: J4.5@1825,2593.7 1891.09,2527.61 ccw(c1930,2566.53) R45.2@1930,2511.5 R41.2@1985,2511.5
  Top Layer w30: IC1.3@1958.55,2710.74 2109.1,2774.69 cw(c2125.45,2736.19) 2109.55,2774.87 2208.27,2815.49 ; 2208.28,2815.49 ccw(c2199.55,2836.77) 2208.94,2815.78 2216.88,2819.33 ccw(c2204.63,2846.71) 2218.44,2820.08 2218.51,2820.12 2251.82,2837.61 ; C32.2@2237.72,2889.25 2237.72,2887.98 ccw(c2260.92,2887.98) 2244.52,2871.58 cw(c2226.9,2853.95) 2251.82,2853.95 2251.82,2837.61 ; 2570.94,2845.22 C30.2@2570.94,2905 ; C31.2@2785,2905 2785,2861.71 cw(c2761.36,2861.71) 2778.08,2845 ; 2962.5,2862.5 cw(c2920.25,2904.75) 2920.25,2845 2778.08,2845 ; 2251.82,2837.61 2258.54,2841.14 2279.5,2852.15 2285.12,2855.1 ccw(c2271.17,2881.66) 2286.24,2855.72 2286.4,2855.81 C29.2@2370.94,2905 2411.66,2864.29 ccw(c2458.22,2910.86) 2458.22,2845 2778.08,2845
  Top Layer w40: C39.2@1736.5,2795 1814.26,2795 cw(c1814.26,2779.81) J4.7@1825,2790.55 J4.5@1825,2593.7 1918.06,2679.9 1937.73,2698.13 1939.91,2700.14 ccw(c1968.55,2629.67) 1914.76,2683.46 ; J4.7@1830,2765 1859.97,2735.03 ccw(c1930.68,2805.74) IC1.3@1930.68,2705.74
  Top Layer w100: v1@2987.26,2895.3 3123.31,2895.3
  Bottom Layer w80: 2835.17,2894.37 cw(c2846.7,2894.37) 2838.55,2902.52 cw(c2823.76,2775.38) 2866.61,2895.99 cw(c2908.09,2805) 2908.09,2905 2980,2905 ; 3079.11,2902.48 3015.44,2902.48 ; 3233.41,2874.21 3224.53,2883.1 ; 2980,2905 ccw(c2986.08,2911.08) 2986.08,2902.48 ; 2980,2905 ccw(c2986.08,2911.08) 2986.08,2902.48 ; 2980,2905 3012.8,2905 ; 2986.08,2902.48 3015.44,2902.48 ; 3012.8,2905 ccw(c3065.67,2957.87) 3015.44,2902.48 ; 3012.8,2905 ccw(c3012.8,2930) 3030.47,2912.32 cw(c3073.15,2869.65) 3030.54,2912.39 3153.82,2912.39 cw(c3153.82,2812.39) 3224.53,2883.1 ; 3015.44,2902.48 ccw(c3065.67,2957.87) 3065.67,2883.1 3131.56,2883.1 3224.53,2883.1
  Bottom Layer w100: 3079.11,2902.48 cw(c3079.11,2821.83) 3131.56,2883.1 cw(c3079.11,2821.83) v1@3136.14,2878.86
  other v1: 3145,2870 3070,2880.83 2977.48,2888.7 3145,2925 2985,2930 3035,2930 3085,2930
boot: C25.1 U3.1 | length 165.1
  Top Layer w20: C25.1@3516.5,2590.79 3519.44,2590.79 3514.29,2595.94 cw(c3585,2666.65) 3485,2666.65 3485,2672.17 cw(c3536.22,2672.17) 3500,2708.39 U3.1@3521.61,2730
comp: C35.2 R38.2 U3.6 | length 208.4
  Top Layer w20: U3.6@3309.02,2830 3323.79,2830 ccw(c3323.79,2881.21) 3360,2845 ccw(c3335.86,2869.14) 3370,2869.14 3370,2903.43 ; R38.2@3321.5,2925 cw(c3321.5,2891.62) 3345.1,2915.22 3347.63,2912.69 ccw(c3370,2935.06) 3370,2903.43 ; C35.2@3366.61,2940.46 cw(c3350,2929.32) 3370,2929.32 3370,2903.43
cp: T1.1 U1.11 | length 3253.1
  Top Layer w20: v2(2385.21,3626.9) v2(2380,3663.5) 2380,3833.79 cw(c2431.21,3833.79) 2394.99,3869.99 ; 2397.07,3872.07 cw(c2431.42,3837.72) 2431.42,3886.3 U1.11@2455,3886.3 ; v2(3948.81,3278.81) cw(c3959.67,3289.67) 3944.3,3289.67 v2(3944.3,3326.19) 3914.73,3370.98 cw(c3965.24,3410.24) 3905.9,3386.32 cw(c3920.75,3396.5) 3902.75,3396.5 cw(c3965.24,3410.24) 3901.26,3410.24 3901.26,3621.83 cw(c3948.17,3621.83) 3902.75,3633.55 3902.75,3636.65 cw(c3920.75,3636.65) 3913.04,3652.92 cw(c3948.17,3621.83) 3915,3655 3925.86,3665.86 cw(c3960,3631.72) 3960,3680 4077.32,3680 ccw(c4077.32,3731.21) 4113.53,3695 ccw(c4098.47,3710.05) 4119.76,3710.05 T1.1@4119.76,3778.39
  Bottom Layer w20: v2(2380,3663.5) 2380,3639.46 ccw(c2397.77,3639.46) v2(2385.21,3626.9) 2460.21,3151.02 ; 2460.21,3153.21 ccw(c2625.68,3185.94) 2506.48,3066.59 ccw(c2589.84,3150.11) 2571.59,3033.53 2745.16,3006.35 2745.23,3006.34 cw(c2741.98,2986.61) 2751.08,3004.42 2767.55,2996.05 cw(c2758.52,2978.21) 2772.56,2992.45 2782.51,2982.52 ccw(c2812.84,3012.92) 2812.84,2969.98 ; 2812.92,2969.97 3078.88,2970.48 cw(c3079.11,2821.83) 3079.35,2970.48 3593.58,2970 ccw(c3593.58,3070) 3664.29,2999.29 3730,3065 3920,3250 v2(3948.81,3278.81) v2(3944.3,3326.19)
cs_2sp30: C17.2 J6.6 R20.1 R24.2 | length 297.1
  Top Layer w20: C17.2@1736.1,3465.86 cw(c1736.1,3455.12) 1743.7,3462.72 ccw(c1773.64,3492.65) 1773.64,3450.31 J6.6@1825,3450.31 J6.6@1831.52,3456.84 ; J6.6@1846.52,3471.84 J6.6@1831.52,3456.84 ; R20.1@1997.01,3485 ccw(c1994.29,3482.29) 1994.29,3486.12 R24.2@1935.98,3486.12 1902.23,3486.12 ccw(c1902.23,3386.12) J6.6@1831.52,3456.83
cs_5019: C18.2 J5.6 R26.1 R31.2 | length 347.3
  Top Layer w20: C18.2@1725,4081.5 ccw(c1723.57,4081.5) 1724.58,4082.51 cw(c1766.56,4082.51) 1736.88,4112.19 J5.6@1825,4200.31 ; J5.6@1824.2,4196.99 2004.74,4196.99 ccw(c2004.74,4207.27) R26.1@2012.01,4200
Din_h1: J4.3 R42.1 R43.2 | length 261.2
  Top Layer w20: R43.2@1716.5,2460 1740,2460 cw(c1740,2425) 1775,2425 ccw(c1803.15,2425) 1803.15,2396.85 J4.3@1825,2396.85 ccw(c1853.61,2425.46) 1853.61,2385 R42.1@1938.5,2385
Din_h2: J4.2 R46.1 R47.2 | length 276.9
  Top Layer w20: R47.2@1716.5,2390 1725.69,2390 cw(c1725.69,2343.84) 1771.85,2343.84 ccw(c1804.76,2343.84) 1804.76,2310.93 1812.5,2310.93 ccw(c1825,2310.93) J4.2@1825,2298.43 cw(c1880.7,2242.73) 1880.7,2321.5 R46.1@1935,2321.5
dis_2sp30: J6.3 R25.1 R28.1 | length 242.2
  Top Layer w20: J6.3@1825,3155.04 1871.76,3201.8 cw(c1942.47,3131.09) 1942.47,3231.09 R28.1@1950.98,3231.09 ; R28.1@1950.98,3236.09 R28.1@1950.98,3231.09 ; R25.1@2028.5,3250 2028.5,3248.03 cw(c1987.59,3288.94) 1987.59,3231.09 R28.1@1950.98,3231.09
dis_5019: J5.3 R1.1 R3.1 | length 189.5
  Top Layer w20: J5.3@1825,3905.04 R3.1@1915,3913.5 2012.01,3913.5 R1.1@2013.5,3915
drive: C25.2 D4.1 L1.1 U3.8 | length 3441.4
  Top Layer w15: D4.1@2991.22,2470 2995.86,2470 cw(c2995.86,2435.86) D4.1@3020,2460 ; 3109.9,2474.14 3165.58,2418.46 ccw(c3236.29,2489.17) 3236.29,2389.17 3331.87,2389.17 ccw(c3331.87,2412.3) 3355,2412.3 3355,2476.37 cw(c3437.93,2476.37) 3379.29,2535.01 3399.05,2554.77 3422.03,2577.75 cw(c3453.5,2546.28) C25.2@3453.5,2590.79
  Top Layer w30: v1@3092.95,2557.05 ccw(c3071.14,2535.21) 3071.14,2566.08 v1(3090.94,2566.08) 3102.2,2566.08 3138.46,2566.08 ; 3155,2655 cw(c3168.89,2641.11) 3168.89,2660.75 3185.75,2660.75 ; 3175,2650 3185.75,2660.75 ; U3.8@3309.02,2730 3296.42,2730 ccw(c3296.42,2630) 3225.71,2700.71 3185.75,2660.75
  Top Layer w40: D4.1@2995.86,2470 3005.51,2482.31 3032.09,2516.25 3036.09,2521.34 3071.14,2566.08 3084.18,2575.47 3095.49,2583.61 3096.03,2584 3100.23,2587.03 3149.17,2622.27 ; D4.1@3020,2460 3058.64,2460 ccw(c3058.64,2560) 3109.9,2474.14 ccw(c3058.64,2560) 3129.35,2489.29 3138.64,2498.58 3147.04,2509.94 3282.84,2693.56 U3.8@3309.02,2718.19 ; L1.1@3070,2629.02 3105.73,2655 3109.79,2657.96 3113.31,2660.51 3124.95,2665.61 3135,2670 ; 3121.11,2633.89 ccw(c3149.17,2661.94) 3149.17,2622.27 ; 3268.5,2708.19 3149.17,2622.27 ; 3290,2710 3290.68,2710 3290.68,2704.16
  Top Layer w80: D4.1@3021.22,2470 3023.58,2470 ccw(c3023.58,2570) 3094.29,2499.29 v1(3105,2510) 3105,2542.59 ccw(c3005,2542.59) 3102.2,2566.08 ccw(c3005,2542.59) 3096.03,2584 ccw(c3005,2542.59) 3075.71,2613.3 L1.1@3070,2619.02 cw(c3054.05,2619.02) 3065.33,2607.74 3008,2550.41 ccw(c3002.22,2552) 3008.21,2552 3008.21,2645.36 cw(c3031.47,2622.1) 3031.47,2655 3105.73,2655 3155,2655
  Bottom Layer w40: v1@3022.2,2577.68 cw(c3022.2,2520.15) 3062.89,2560.83 3067.39,2556.32 cw(c3054.57,2569.14) 3054.57,2551.02 3039.24,2551.02 cw(c3039.24,2556.3) 3035.51,2552.56 3010.39,2577.68 3010.39,2580.47 ccw(c2980.94,2580.47) 3001.77,2601.3 3001.77,2601.59 ccw(c2961.59,2601.59) 2990,2630 2993.54,2626.46 ccw(c3048.1,2681.02) 3048.1,2603.86 ccw(c3079.35,2603.86) 3057.26,2581.76 3061.34,2577.68 3062.94,2577.68 cw(c3062.94,2538.08) v1(3090.94,2566.08) 3090.94,2543.95 ccw(c3105.65,2543.95) 3091.07,2541.97 ; 3069.45,2525.19 3070.45,2526.19 cw(c3140,2456.64) 3091.07,2541.97 ; 3096.83,2598.17 cw(c3081.02,2598.17) 3092.2,2586.98 3110.5,2568.68 ccw(c3137.5,2595.68) 3137.5,2557.5 ; 3091.07,2541.97 ccw(c3105.65,2543.95) 3095.25,2533.55 ccw(c3127.96,2566.26) 3127.96,2520 3148.76,2520 ; 3091.07,2541.97 cw(c3140,2456.64) 3092.27,2542.64 ccw(c3148.76,2601.77) 3148.76,2520 ; 3137.5,2557.5 3175,2520 ; 3137.5,2557.5 3078.92,2616.08 ccw(c3008.21,2545.36) 3008.21,2645.36 v1(2989.17,2645.36) ccw(c3009.5,2625.04) 2980.75,2625.04 2980.75,2609.97 cw(c2900,2575) 2987.71,2567.82 ccw(c3043.24,2607.48) 2994.99,2559.22 v1(3021.22,2532.99) 3024.92,2529.29 ccw(c3095.63,2600) 3095.63,2500 3200,2500 cw(c3200,2512.07) 3191.46,2503.54 3175,2520 ; 3148.76,2520 3175,2520
  other v1: 3045.82,2505.49 3030.08,2577.68 2990,2590 3060.16,2619.02
en_2sp30: J6.2 R7.1 | length 155.2
  Top Layer w20: J6.2@1825,3056.61 cw(c1848.86,3056.61) 1831.99,3073.48 R7.1@1928.5,3170
en_5019: J5.2 R15.1 | length 100.3
  Top Layer w20: J5.2@1825,3806.61 1907.54,3806.61 cw(c1907.54,3784.03) R15.1@1923.5,3800
GND: C1.1 C2.1 C3.1 C4.1 C5.1 C6.1 C7.1 C8.2 C9.1 C10.1 C11.1 C12.1 C13.1 C14.1 C15.1 C16.1 C17.1 C18.1 C19.2 C20.1 C21.1 C22.1 C23.1 C24.1 C26.1 C27.1 C28.1 C29.1 C30.1 C31.1 C32.1 C33.1 C34.1 C35.1 C36.1 C37.1 C38.2 C39.1 C40.1 C41.1 D1.2 D4.2 D5.2 D6.2 IC1.1 J2.1 J2.2 J2.3 J2.4 J3.5 J3.6 J4.1 J5.7 J6.7 J7.4 J7.5 J7.6 J7.7 LD1.1 LD2.1 LD3.1 LD4.1 LD5.1 LD6.1 R12.1 R17.1 R23.1 R24.1 R29.1 R31.1 R34.1 R39.1 R43.1 R47.1 T3.1 T4.1 T7.1 T7.4 U1.6 U1.18 U1.19 U1.20 U1.26 U1.27 U1.28 U2.18 U2.19 U2.20 U2.26 U2.27 U2.28 U3.7 U4.3 | length 26696.9
  Top Layer w10: T7.4@2009.41,2236.69 2009.41,2256.5 cw(c2028.5,2256.5) 2014.95,2269.95 cw(c2022.05,2262.91) 2021.89,2272.91 2068.93,2273.61 ccw(c2068.46,2304.61) 2076.19,2274.58 LD1.1@2175,2300 ; T7.1@2060.59,2323.31 cw(c2062.02,2324.73) 2060.55,2323.35 cw(c2062.02,2324.73) 2060,2324.73 2060,2480 cw(c2107.68,2480) 2073.97,2513.71 2077.36,2517.11 cw(c2096.41,2498.07) U4.3@2096.41,2525 ; T4.1@2141.69,3735.59 2156.69,3735.59 2177.94,3797.45 LD3.1@2180,3803.46 ; LD4.1@2166.64,3095 2166.64,3053.11 ccw(c2178.11,3053.11) 2170,3045 ccw(c2182.71,3057.71) 2182.71,3039.73 T3.1@2200.04,3039.73
  Top Layer w20: 1645,3728.02 ccw(c1665.2,3748.22) 1665.2,3719.65 1722.64,3719.65 cw(c1721.2,3721.09) 1721.2,3719.06 C27.1@1720,3719.06 ; C17.1@1736.1,3528.86 1776.99,3528.86 ccw(c1776.99,3596.75) J6.7@1825,3548.74 1935.61,3548.74 R24.1@1935.98,3549.12 cw(c1938.12,3546.98) 1938.12,3550 R23.1@1998.5,3550 1998.5,3560.17 cw(c2054.83,3560.17) 2015,3600 cw(c2039.14,3575.86) 2039.14,3610 2060,3610 2061.41,3610.2 2095,3615 2097.59,3616.17 2109.47,3621.54 2154.33,3621.54 cw(c2154.33,3603.54) 2172.32,3604.15 2172.38,3602.34 2174.99,3528.24 cw(c2155,3527.48) 2175,3527.48 LD6.1@2175,3498.46 ; J5.7@1825,4298.74 1847.83,4298.74 cw(c1847.83,4198.74) 1918.54,4269.45 R31.1@1925,4262.99 cw(c1929.85,4258.14) 1929.85,4265 R29.1@2012.01,4265 ; R17.1@2095,3793.5 LD3.1@2175,3798.46 ; R12.1@2100,3110 2116.13,3110 cw(c2116.13,3091.06) 2129.53,3104.45 ccw(c2143.99,3118.91) 2143.99,3098.46 LD4.1@2175,3098.46 ; 2173.79,4340 LD2.1@2175,4198.46 2175,4190.8 ccw(c2195,4190.8) LD2.1@2182.92,4174.86 ; LD2.1@2180,4186.1 2230.56,4134.3 ccw(c2277.16,4180.9) 2277.16,4115 ; 2282.16,4115 2321.72,4115 cw(c2321.72,4046.72) 2370,4095 ccw(c2396.33,4121.33) 2396.33,4084.09 2401.55,4084.09 U1.6@2455,4083.15 ; U2.18@3171.54,3099.72 3179.76,3099.72 ccw(c3179.76,3163.71) 3225,3118.46 3225,3138.46 ccw(c3223.48,3136.94) 3223.48,3139.09 U2.19@3171.54,3139.09 ; U2.20@3171.54,3178.46 3176.72,3178.46 cw(c3176.72,3110.18) 3225,3158.46 ; U2.26@3171.54,3414.68 3179.66,3414.68 ccw(c3179.66,3478.8) 3225,3433.46 ; U2.27@3171.54,3454.05 3220.39,3454.05 ; U2.28@3171.54,3493.42 U2.28@3188.88,3493.42 ; U1.18@3171.54,3807.56 3182.89,3807.56 ccw(c3182.89,3867.11) 3211.48,3814.87 ; U1.20@3171.54,3886.3 3185.65,3886.3 cw(c3185.65,3830.65) 3225,3870 ; U1.26@3171.54,4122.52 3182.8,4122.52 ccw(c3182.8,4182.2) 3219.08,4134.82 ccw(c3182.8,4182.2) 3225,4140 ; U1.27@3171.54,4161.89 3223.53,4161.89 ; U1.28@3171.54,4201.26 3185.75,4201.26 cw(c3185.75,4145.75) 3225,4185 ; 3223.53,4151.89 ccw(c3223.53,4153.97) 3225,4152.5 3225,4153.33 3225,4160.42 3225,4175 ; 3225,3455.96 3225,3478.46 ccw(c3188.88,3442.34) U2.28@3188.88,3493.42 ; 3225,3825 cw(c3182.89,3867.11) 3211.48,3814.87 ; 3225,3837.5 3225,3846.98 3225,3860 ; 3225,4130 3225,4131.96 3225,4140 ; 3225,4150.42 3225,4140 ; 3245,3830 3211.49,3814.87 ; 3291.54,3545.12 3280.6,3534.18 3269.13,3522.71 cw(c3198.42,3593.42) 3198.42,3493.42 U2.28@3188.88,3493.42 ; LD4.1@2175,3098.46 ccw(c2175,3086.64) 2166.64,3095 ccw(c2166.64,3106.82) LD4.1@2175,3098.46
  Top Layer w22: R39.1@3245,2793.5 ccw(c3277.6,2826.11) 3277.6,2780 U3.7@3309.02,2780 3400.03,2780
  Top Layer w25: 1645,3765 ccw(c1632.93,3752.93) 1638.53,3769.06 1645,3769.06
  Top Layer w30: 1645,2861.81 1872.1,2861.81 ccw(c1872.1,2902.26) 1900.7,2873.65 ccw(c1836.38,2937.98) 1927.35,2937.98 ; 1927.35,2937.96 1927.35,2959.13 cw(c1944.42,2959.13) C26.1@1932.35,2971.2 ; C32.1@2292.28,2920.75 2335,2960 cw(c2351.28,2943.72) 2351.28,2966.74 2459.51,2966.74 2489.36,2966.53 ; C29.1@2489.06,2905 2489.36,2905.31 2489.36,2966.53 ; C30.1@2689.06,2905 2689.06,2959.92 cw(c2696.34,2959.92) 2691.19,2965.07 ; C31.1@2903.11,2905 2903.11,2926.99 cw(c2916.55,2926.99) 2907.05,2936.5 2907.05,2950.5 ccw(c2888.59,2950.5) 2901.64,2963.55 2691.19,2965.07 ; 3400.03,2780 cw(c3400.03,2772.88) 3405.06,2777.92 ; C33.1@3468.5,2935 3468.5,2942.25 cw(c3507.75,2942.25) 3480,2970 cw(c3516.21,2933.79) 3516.21,2985 3540,2985 cw(c3540,2936.72) 3574.14,2970.86 3580.01,2964.99 cw(c3543.79,2928.79) 3595,2928.79 C21.1@3595,2896.5 ; C13.1@3550,4143.5 cw(c3542.44,4135.94) 3553.13,4135.94 3553.13,4084.45 3553.13,4002.29 cw(c3530.43,3998.58) 3553.43,3998.58 ; C8.2@3553.13,3808.94 3553.13,3848.13 3553.13,3949.6 ccw(c3530.43,3953.31) 3553.43,3953.31 ; C24.1@4154.69,2306.3 4247.81,2399.42 ccw(c4242.49,2404.72) J7.7@4250,2404.72 ; C23.1@4221.5,2465 J7.6@4250,2465 ; 2489.36,2966.53 2689.09,2965.09 2691.19,2965.07
  Top Layer w40: 1645,3765 1645,3728.02 1645,3482.99 1645,2945.34 1645,2861.81 1645,2421.42 ccw(c1745,2421.42) 1674.29,2350.71 J4.1@1825,2200 ; 1645,3769.06 1645,3978.5 ; C18.1@1725,4018.5 1685,4018.5 ccw(c1685,3978.5) 1645,3978.5 ; U4.3@2096.41,2525 U4.3@2118.7,2525 2185,2525 ; LD1.1@2175,2300 cw(c2216.25,2341.25) 2157.91,2341.25 C37.1@2157.91,2385 ccw(c2092.52,2450.39) 2157.95,2385.04 ccw(c2092.52,2450.39) 2185,2450.39 2185,2525 ; LD5.1@2175,2700 2185,2581.57 2185,2525 ; v3(2224.35,2200) ccw(c2296.78,2272.43) 2296.78,2170 C36.1@2420,2170 ; C36.1@2420,2190 C36.1@2420,2170 ; 2907.05,2950.5 cw(c2975.74,2881.81) 2975.74,2978.96 3180.92,2978.96 cw(c3180.92,2938.96) C34.1@3182.37,2978.93 ; C34.1@3183.75,2978.86 ccw(c3180.92,2938.96) C34.1@3182.37,2978.93 ; C35.1@3426.5,2935 3412.2,2949.29 ccw(c3341.49,2878.58) 3410.2,2951.24 3410.2,2954.69 ccw(c3382.2,2954.69) 3382.2,2982.69 3344.8,2982.69 ccw(c3344.8,2954.69) 3330.21,2978.58 3201.06,2978.89 C34.1@3182.37,2978.93 ; C35.1@3426.5,2945 C35.1@3426.5,2946.03 ; 3550,2270 cw(c3450,2270) 3550,2269.1 ; C40.1@3750,2168.5 3742.77,2168.5 cw(c3742.77,2173.61) 3739.16,2170 3649.1,2170 ; C40.1@3750,2170 3994.1,2170 ccw(c3994.1,2461.89) 4200.49,2255.49 4235.71,2290.71 4350.71,2400.71 ccw(c4280,2471.42) 4380,2471.42 4380,3795 ; D1.2@4182.4,3325.76 4260.49,3325.76 ccw(c4260.49,3390.27) 4325,3390.27 ; 4200,3990 4202.03,3990 4250,3990 4272.45,3990 ccw(c4272.45,4043.99) 4309.88,4005.08 ; J7.5@4250,2595.27 4295.71,2640.98 ccw(c4225,2711.7) 4325,2711.7 4325,3390.27 ; J2.4@4250,3800 4250,3812.6 4250,3844.44 ; J2.3@4260,3923.85 cw(c4251.4,3795.55) 4380,3795.55 ; 4295.8,3844.2 cw(c4225,3773.58) 4325,3773.58 4325,3390.27 ; 4303.94,3986.38 4309.88,4005.08 ; 4310.62,4005.81 cw(c4272.45,4043.99) 4309.88,4005.08 ; 1645,3978.5 1645,4077.32 cw(c1745,4077.32) 1674.29,4148.03 J5.7@1825,4298.74 1836.97,4310.71 cw(c1907.68,4240) 1907.68,4340 2173.79,4340 4063.58,4340 cw(c4063.58,4240) 4134.29,4310.71 4295.51,4149.49 cw(c4224.8,4078.78) 4324.8,4078.78 4324.8,4052.04 4310.16,4005.96 4309.88,4005.08 ; C36.1@2420,2170 3333.18,2170 cw(c3333.18,2130) C41.1@3343.29,2168.7 3352.11,2169.73 cw(c3356.79,2130) 3356.79,2170 3450,2170 ; 3450,2170 ccw(c3450,2270) 3550,2269.1 ; 3450,2170 3649.1,2170 ; 3550,2269.1 ccw(c3649.1,2269.1) 3649.1,2170
  Top Layer w50: 3563.43,3953.31 3563.43,3998.58
  Top Layer w60: 3210.63,4138.9 3219.08,4134.82 3225,4131.96 3255.66,4117.15 3316.79,4087.62 ; 3215,3850 ccw(c3215,3870.06) 3216.38,3850.05 ; 3223.53,4151.89 3225,4150.42 ; 3225,3846.98 3231.61,3850.91 ; 3225,4160.42 3232.64,4152.77 ; 3239.09,3152.55 cw(c3245,3146.64) 3245,3155 ; C38.2@3390,3208.68 3390,3483.58 cw(c3490,3483.58) 3419.29,3554.29 ; 3429.29,3564.29 3739.57,3874.57 cw(c3810.28,3803.86) 3810.28,3903.86 4004.87,3904.5 4059.87,3904.69 4070,3904.72 4103.86,3904.72 cw(c4103.86,3804.72) 4174.57,3875.43 J2.4@4250,3800 ; C6.1@3463.73,4084.09 ccw(c3461.83,4144.06) 3467.17,4084.29 ccw(c3461.83,4144.06) C6.1@3495,4094.06 ; C1.1@4195,3800 J2.4@4223.07,3800
  Top Layer w80: 3225,3138.46 3239.09,3152.55 ; 3225.53,4138.9 cw(c3253.03,4042.75) 3244.94,4142.43 cw(c3253.03,4042.75) 3323.74,4113.47 ; 3235,3860 3264.54,3892.07 3273.06,3903.2 3273.89,3904.36 3307.57,3951.64 3323.54,3974.06 cw(c3454.4,3894.78) 3424.46,4044.82 C6.1@3463.73,4084.09 ; 3245,3155 3272.33,3194.67 3273.94,3197 3296.87,3219.93 ; D4.2@3279.16,2514.15 cw(c3347.45,2514.15) 3297.86,2561.1 ; 3293.87,3214.93 ccw(c3243.25,3265.55) 3314.84,3265.55 ; 3299.18,2562.42 C19.2@3381.66,2644.92 ; 3315,3270.55 3315,3430 ; 3340.58,4002.36 3336.54,4002.36 3336.54,4047.64 ccw(c3288.54,4047.64) 3336.54,4048.37 cw(c3427.69,4007.24) 3356.97,4077.95 3358.5,4079.47 ; C19.2@3386.1,2646.1 3405.9,2665.9 ccw(c3335.19,2736.61) 3435.19,2736.61 3435.11,2777.97 3435.11,2780.06 3435.07,2802.92 ; C35.1@3434.83,2935.01 3434.83,2934.96 3435.06,2807.92 ; J3.6@3500,2275 3550,2275 ; 3550,2269.1 3550,2275 ; J3.5@3600,2275 3550,2275 ; D5.2@3793.11,2445 D6.2@3721.89,2445 3688.17,2445 ccw(c3688.17,2345) 3617.46,2415.71 3579.29,2377.54 ccw(c3650,2306.83) 3550,2306.83 3550,2275 ; J7.7@4250,2404.72 4250,2465 J7.6@4250,2503.15 J7.5@4250,2595.27 ; J7.5@4250,2601.57 J7.4@4250,2695.27 ; 4250,3945 4250,3990 J2.2@4250,4000 J2.1@4250,4100
  Top Layer w100: 3225,4153.33 3244.94,4142.43 3264.41,4131.79 3323.27,4099.61 3350,4085
  Top Layer w110: J2.4@4250,3812.6 J2.3@4260.09,3888.5
  Top Layer w150: 3279,3428 3279.75,3477.64 3280.6,3534.18 3280.63,3535.93 ; 3280.57,3534.81 cw(c3378.67,3534.81) 3303.16,3597.44 ; 3280.58,3534.43 3280.58,3534.78 ; 3303.57,3597.96 3335.32,3629.79 3340.03,3634.5 ; 3339.57,3633.96 cw(c3416.54,3570.12) 3340.03,3634.5 ; 3361.52,4084.59 3424.57,4084.41 3467.17,4084.29 3494.97,4084.21 3495.04,4084.21 3550.24,4084.44 3553.13,4084.45 3553.35,4084.46 3685,4085 ; 3725,4020 3553.13,3848.13 3533.54,3828.49 3387.49,3682.08 3340.03,3634.5
  Top Layer w220: 3655,4050 3749.95,4049.95 3947.73,4049.85 4048.78,4049.8 cw(c4048.78,3949.8) 4119.49,4020.51 ; 4114.49,4025.51 4119.32,4023.5 4182.16,3998.05 4202.03,3990 4204.96,3988.81 J2.2@4216.04,3984.33
  Bottom Layer w20: LD4.1@2175,3098.46 LD6.1@2175,3498.46 ; LD3.1@2175,3798.46 LD2.1@2175,4198.46 ; LD6.1@2180,3503.46 LD3.1@2180,3803.46
  Bottom Layer w40: LD1.1@2175,2300 v3(2224.35,2200) 2235.98,2188.38 ccw(c2274.32,2226.72) v3(2274.32,2172.49)
  Bottom Layer w80: C19.2@3386.57,2640 3386.57,2644.96 ccw(c3384.97,2644.96) 3386.11,2646.09 3462.91,2569.29 ccw(c3533.62,2640) 3533.62,2540 3705.31,2540 ccw(c3705.31,2640) 3776.02,2569.29 4125.71,2918.98 ccw(c4055,2989.69) 4155,2989.69 4155,3003.58 cw(c4255,3003.58) 4184.29,3074.29 4315.71,3205.71 ccw(c4245,3276.42) 4345,3276.42 4345,3865.45 ccw(c4276.04,3865.45) 4324.8,3914.21 4323.3,3915.71 ccw(c4252.59,3845) 4252.59,3945 4250,3945 ; J3.6@3500,2275 J3.5@3600,2275 ; J7.7@4250,2404.72 J7.6@4250,2503.15 J7.5@4250,2601.57 J7.4@4250,2700 ; J2.4@4250,3800 J2.3@4250,3900 4250,3945 ; J2.1@4250,4100 J2.2@4250,4000 4250,3945